# Altium PCB btl.PcbDoc
Units mil, origin at the board's own origin, x right, y up, seen from the top; angles counter-clockwise.
Board outline 2865 x 3710 mil, 2 copper layers (Top Layer, Bottom Layer); 12 components, 18 nets, 88 pads, 0 vias.
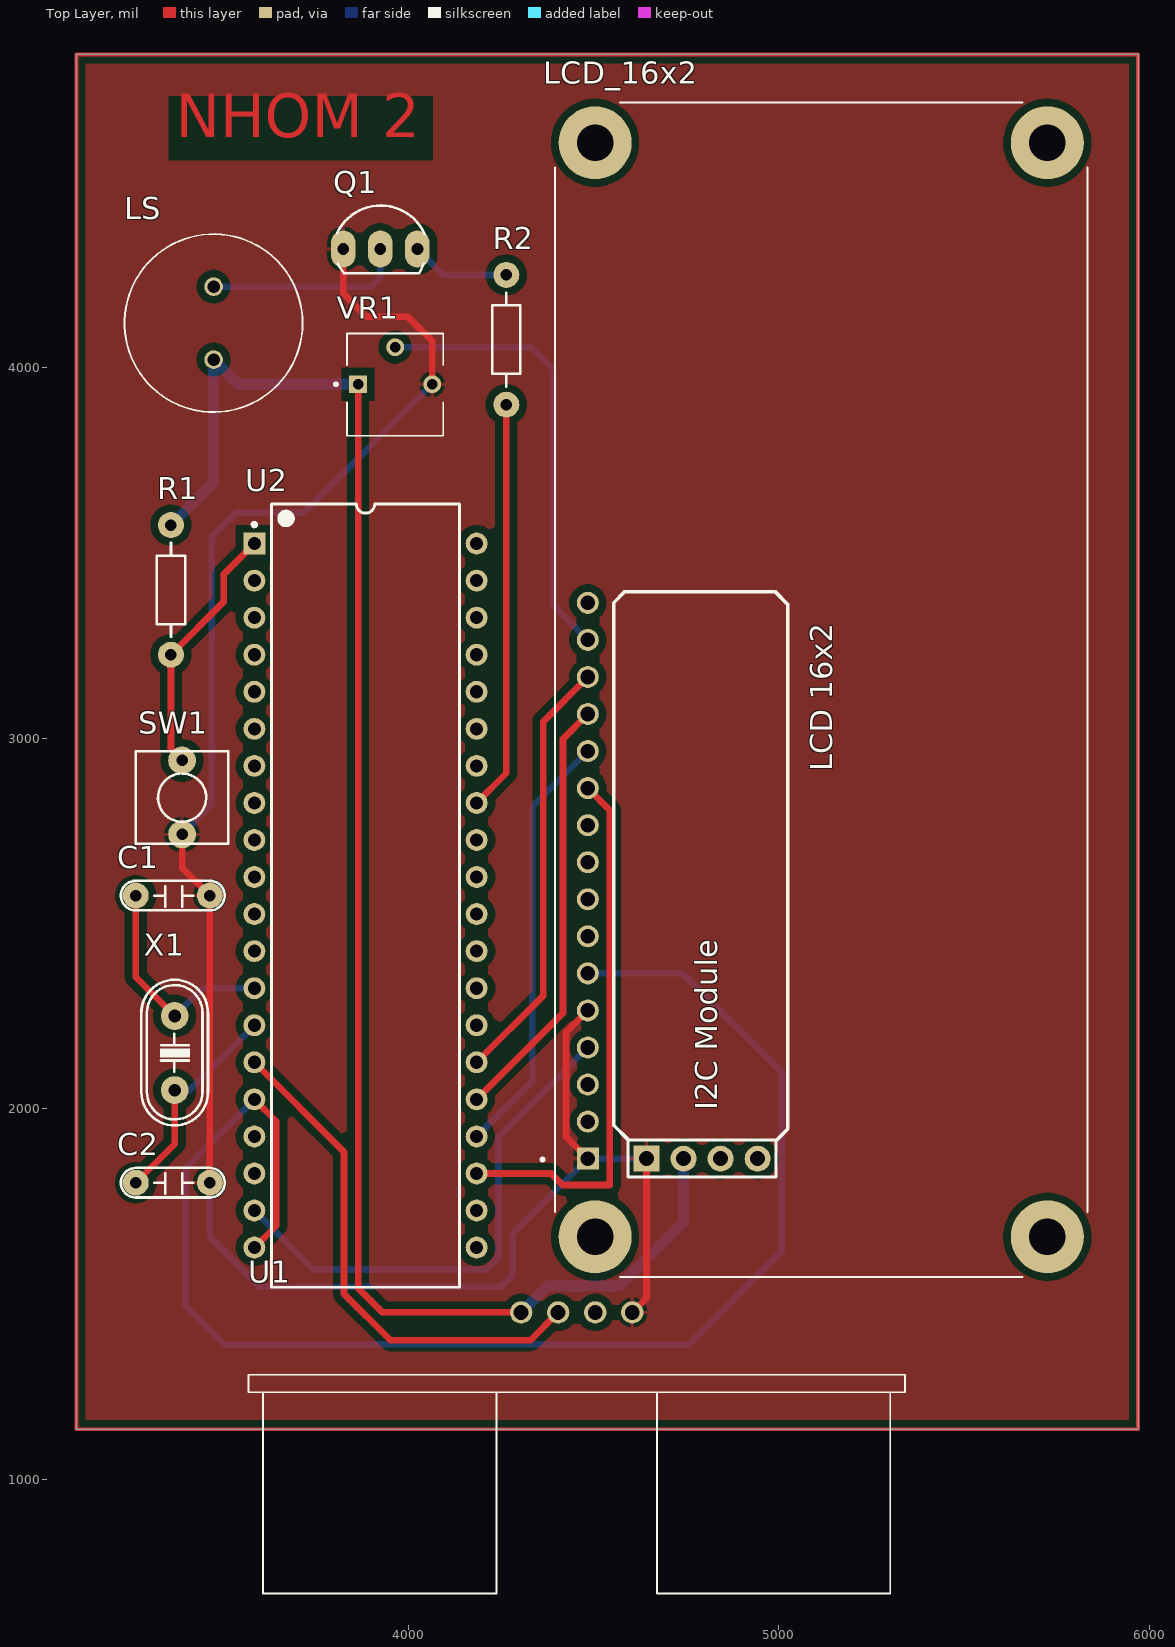
[diagram p0: Top Layer view]
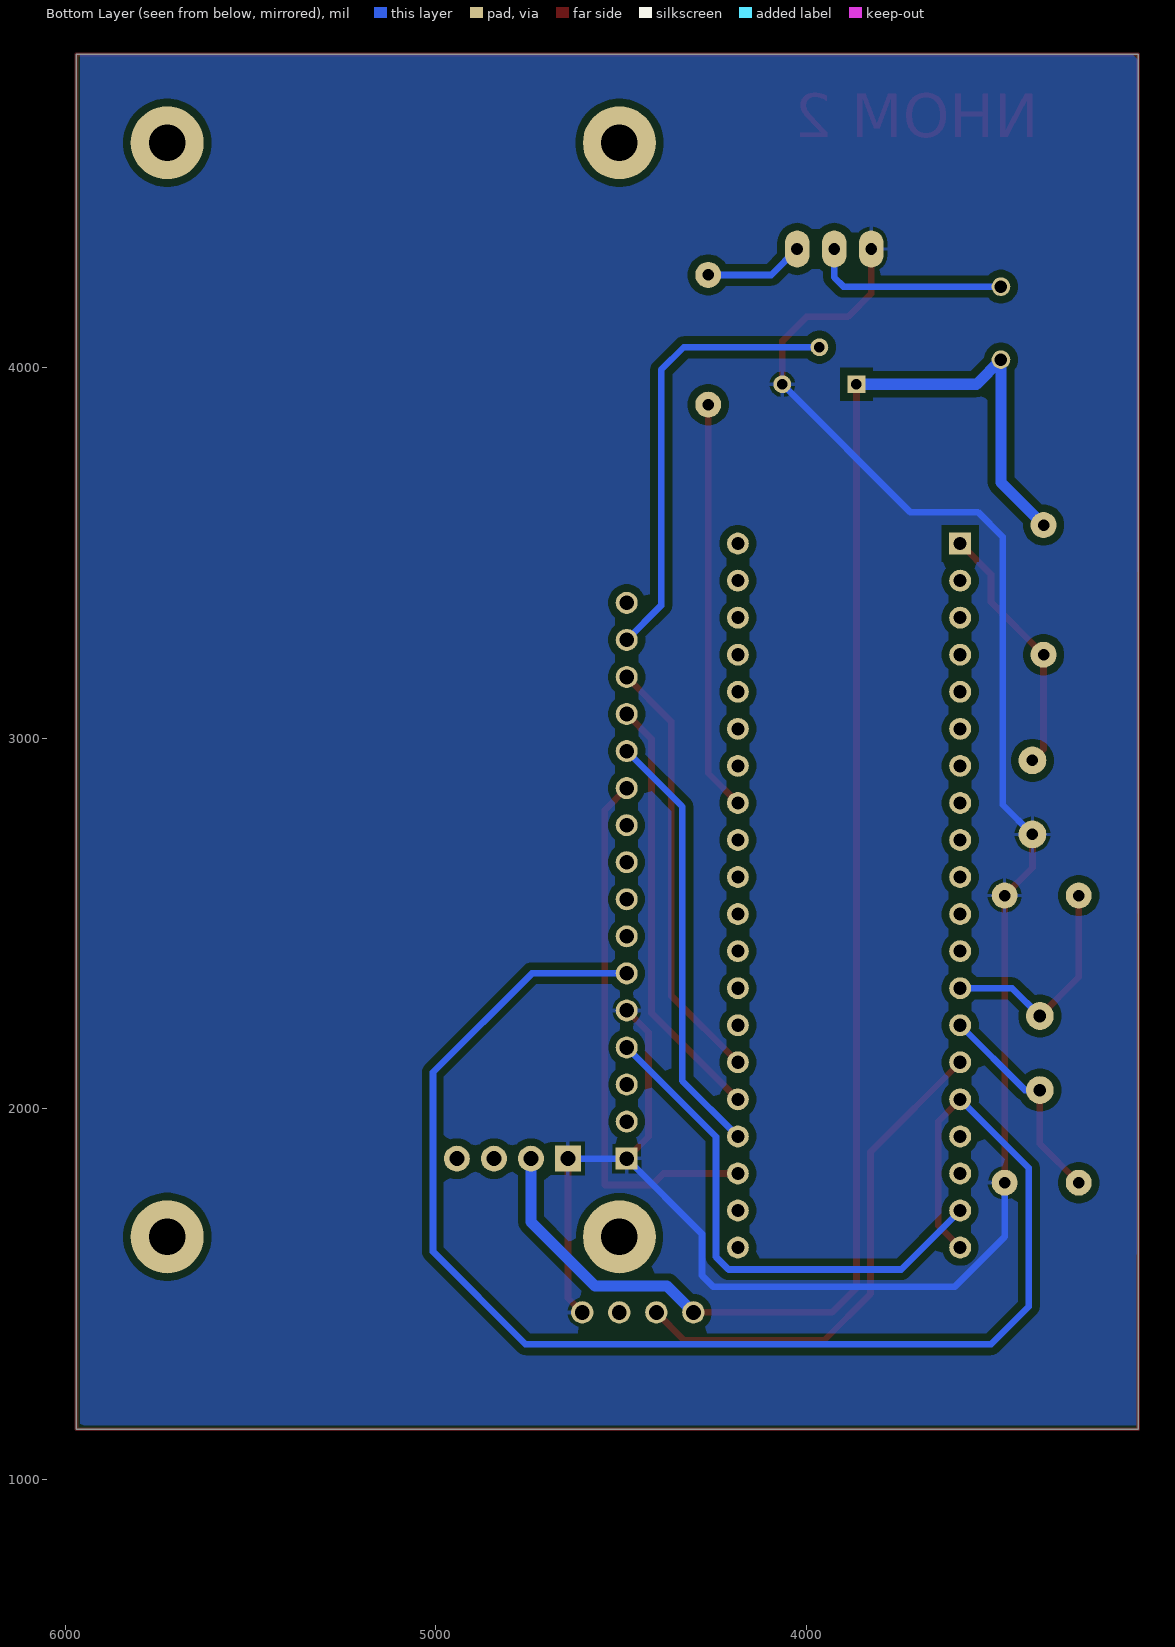
[diagram p1: Bottom Layer view, seen from below]
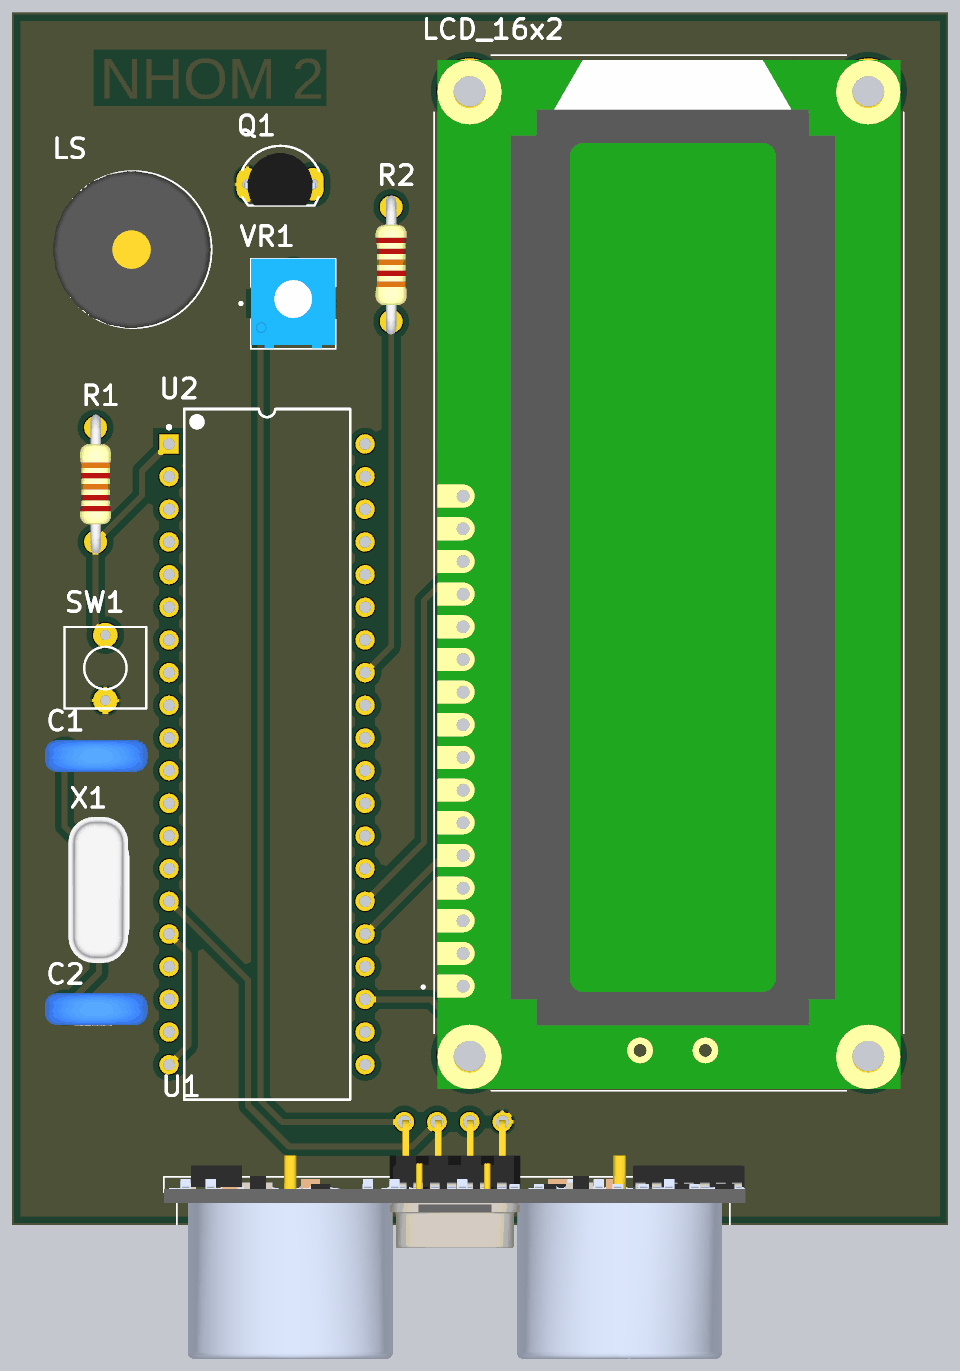
[diagram p2: 3D render of the assembled board from above, using the file's embedded part models]

## Layer stack, top to bottom
Top Solder: solder mask 0.4, Solder Resist, Dk 3.5
Top Layer: signal copper 1.4
Dielectric 1: dielectric 12.6, FR-4, Dk 4.8
Bottom Layer: signal copper 1.4
Bottom Solder: solder mask 0.4, Solder Resist, Dk 3.5

## Board outline
3105,1135 5970,1135 5970,4845 3105,4845

## Design rules (kind name [scope] priority, off if disabled: settings)
Clearance [All] p1: gap=20 ignorepadtopadclearanceinfootprint=FALSE
PolygonConnect [All] p1: connectstyle=Relief reliefconductorwidth=10 reliefentries=4 polygonreliefangle="90 Angle" airgapwidth=10
RoutingVias [All] p1: holewidth=28 width=50 viastyle="Through Hole" minholewidth=28 minwidth=50 maxholewidth=28 maxwidth=50
SolderMaskExpansion [All] p1: expansion=4 istentingtop=FALSE
SupplyNets "Schematic Supply Nets_2" [InNet('GND')] p1: voltage=0.000
SupplyNets "Schematic Supply Nets_1" [InNet('+5V')] p2: voltage=0.000
SupplyNets "Schematic Supply Nets" [InNet('5V')] p3: voltage=0.000
Width D7 [InNet('D7')] p1: maxlimit=18 minlimit=18 preferedwidth=18
Width D6 [All] p2: maxlimit=18 minlimit=18 preferedwidth=18
Width D5 [InNet('D5')] p3: maxlimit=18 minlimit=18 preferedwidth=18
Width D4 [InNet('D4')] p4: maxlimit=18 minlimit=18 preferedwidth=18
Width D1 [InNet('D1')] p5: maxlimit=18 minlimit=18 preferedwidth=18
Width D0 [InNet('D0')] p6: maxlimit=18 minlimit=18 preferedwidth=18
Width C1 [InNet('C1')] p7: maxlimit=18 minlimit=18 preferedwidth=18
Width C0 [InNet('C0')] p8: maxlimit=18 minlimit=18 preferedwidth=18
Width B0 [InNet('B0')] p9: maxlimit=18 minlimit=18 preferedwidth=18
Width GND [InNet('GND')] p10: maxlimit=15 minlimit=15 preferedwidth=15
Width 5V [InNet('+5V')] p11: maxlimit=30 minlimit=30 preferedwidth=30
30 further rules are at their usual default settings.

## Components (designator, comment, footprint, x,y, rotation, side; value= is the part's Value field where it differs from the comment)
C1 "22pF" CN2 3465,2575 r180 top value=0.1uF
C2 "22pF" CN2 3465,1800 r180 top value=0.1uF
LCD_16x2 "LCD_16x2" LCD_16x2 5114.92,3130.35 r90 top
LS "PS1240P02BT" XDCR_PS1240P02BT 3475,4120 r270 top
Q1 "C1815" QTO-92 3925,4320 r0 top
R1 "10k" R1/4W 3360,3575 r270 top value="R1/4W - 1K"
R2 "470" R1/4W 4265,3900 r90 top value="R1/4W - 1K"
SW1 "SW" SW2 3390,2740 r90 top value="SW chip 2 pin"
U1 "HC-SR04" XCVR_HC-SR04 4455,1450 r0 top
U2 "PIC16F877A-I/P" PDIP600-P40 3885,2575 r0 top
VR1 "3362P-1-253LF" TRIM_3362P-1-253LF 3965,3955 r0 top
X1 "20Mhz" XT2 3370,2150 r270 top value=4Mhz

## Footprints (in the part's own frame and the unit in brackets; to place one, negate y for a bottom-side part, rotate by r counter-clockwise, add the part's x,y. Pads: shape width x height; smd on the part's side, far side on the other; paste and mask are expansions set on the pad)
CN2 [mil]
  round 70 hole 31: 1(0,0) 2(200,0)
  silkscreen extent -40,-40 240,40, body extent -54,-44 260,55, height 407
LCD_16x2 [mm]
  rect 1.508x1.508 hole 1: 1(-32.14,16)
  round 1.508 hole 1: 2(-29.6,16) 3(-27.06,16) 4(-24.52,16) 5(-21.98,16) 6(-19.44,16) 7(-16.9,16) 8(-14.36,16) 9(-11.82,16) 10(-9.28,16) 11(-6.74,16) 12(-4.2,16) 13(-1.66,16) 14(0.88,16) 15(3.42,16) 16(5.96,16)
  rect 1.778x1.778 hole 1.016: GND(-32.14,11.977)
  round 5 hole 2.5: S1(-37.5,15.5) S2(37.5,15.5) S3(37.5,-15.5) S4(-37.5,-15.5)
  round 1.778 hole 1.016: SCL(-32.14,4.357) SDA(-32.14,6.897) VCC(-32.14,9.437)
  silkscreen extent -40.25,-18.25 40.25,19.2, body extent -40.13,-18 39.87,18, height 10.68
PDIP600-P40 [mm] "DIP, 40-Leads, Row Spacing 15.24mm, Pitch 2.54mm, Body 51.8x13.5mm"
  rect 1.5x1.5 hole 0.9: 1(-7.62,24.13)
  round 1.5 hole 0.9: 2(-7.62,21.59) 3(-7.62,19.05) 4(-7.62,16.51) 5(-7.62,13.97) 6(-7.62,11.43) 7(-7.62,8.89) 8(-7.62,6.35) 9(-7.62,3.81) 10(-7.62,1.27) 11(-7.62,-1.27) 12(-7.62,-3.81) 13(-7.62,-6.35) 14(-7.62,-8.89) 15(-7.62,-11.43) 16(-7.62,-13.97) 17(-7.62,-16.51) 18(-7.62,-19.05) 19(-7.62,-21.59) 20(-7.62,-24.13) 21(7.62,-24.13) 22(7.62,-21.59) 23(7.62,-19.05) 24(7.62,-16.51) 25(7.62,-13.97) 26(7.62,-11.43) 27(7.62,-8.89) 28(7.62,-6.35) 29(7.62,-3.81) 30(7.62,-1.27) 31(7.62,1.27) 32(7.62,3.81) 33(7.62,6.35) 34(7.62,8.89) 35(7.62,11.43) 36(7.62,13.97) 37(7.62,16.51) 38(7.62,19.05) 39(7.62,21.59) 40(7.62,24.13)
  silkscreen extent -7.74,-26.85 6.45,26.85, body extent -7.3,-26.85 7.3,26.85, height 6.35
QTO-92 [mil] "TO-92"
  oval 66x100 hole 32: 1(-100,0) 2(0,0) 3(100,0)
  silkscreen extent -117,-65 120,118, body extent -109,-66 109,95, height 245
R1/4W [mil] "R 1/4W, 2 Pin, 350mil"
  round 70 hole 31: 1(0,0) 2(350,0)
  silkscreen extent 48,-38 302,38, body extent -40,-47 386,47, height 111
SW2 [mil] "SW button 2pin, 250x 250 mil"
  round 75 hole 31: 1(0,0) 2(200,0)
  silkscreen extent -25,-125 225,125
TRIM_3362P-1-253LF [mil]
  rect 48.11x48.11 / inner round 48.11 / far side rect 48.11x48.11 hole 28.11: 1(-100,0)
  round 48.11 hole 28.11: 2(0,100) 3(100,0)
  silkscreen extent -164,-139 130,137, body extent -130,-138 130,138, height 192
XCVR_HC-SR04 [mm]
  round 1.53 hole 1.02: 1(-3.81,0) 2(-1.27,0) 3(1.27,0) 4(3.81,0)
  silkscreen extent -22.5,-19.27 22.5,-4.27, body extent -22.47,-18.42 22.73,0.13, height 20.46
XDCR_PS1240P02BT [mm]
  round 1.28 hole 0.85: 1(-2.5,0) 2(2.5,0)
  silkscreen extent -6.1,-6.1 6.1,6.1, body extent -6.1,-6.22 6.1,5.98, height 6.68
XT2 [mil] "Footpin for Crystal 2 pin"
  round 75 hole 34: 1(-100,0) 2(100,0)
  silkscreen extent -198,-90 195,90, body extent -233,-93 213,90, height 138

## Part data
C1 C2: library part CN2, "Cap np 104 => 105pF"
LCD_16x2: "Display: LCD; alphanumeric; STN Negative; 16x2; blue; LED; PIN: 16", Package=None, Availability=Unavailable, MP=RC1602B-BIW-CSV, Price=None
LS: "Buzzers Transducer, Externally Driven Piezo 3V 4kHz 60dB @ 3V, 10cm Through Hole PC Pins", Package="2020 TDK", Availability=Unavailable, MF=TDK, MP=PS1240P02BT, Price=None, SnapEDA_Link=https://www.snapeda.com/parts/PS1240P02BT/TDK/view-part/53420/?ref=snap
Q1: "NPN 600mW, ECB"
R1 R2: library part R1/4W, "Resistor 1/4W"
SW1: library part SW2, "Switch button 2 pin"
U1: "Ultrasonic Sensor Module", Package=None, Availability=Unavailable, MP=HC-SR04, Price=None
U2: "Enhanced FLASH Microcontroller, 8K (x14-Bit words) FLASH, 368 Bytes RAM, 40-Pin PDIP, Standard VDD Range, Industrial Temperature", Supplier Part Number 1=PIC16F877A-I/P-ND, ComponentAvailability="Unknown. Contact manufacturer to determine status.", ComponentLink1Description=Datasheet, ComponentLink1URL=http://ww1.microchip.com/downloads/en/DeviceDoc/39582b.pdf, ComponentLink2Description="Packaging Specification", ComponentLink2URL=http://www.microchip.com/stellent/groups/techpub_sg/documents/packagingspec/en012702.pdf, ComponentLink3Description="Microchip.com Home", ComponentLink3URL=http://www.microchip.com/, DatasheetVersion="revB, Oct-2003", LatestRevisionDate=29-Jan-2009, LatestRevisionNote="Sch. layout revised. 3D Model Removed.", PackageDescription="40-Lead Plastic Dual In-Line (P) - 600 mil Body [PDIP]", PackageReference=PDIP600-P40, PackageVersion="revBB, Aug-2009", Published=11-Oct-2004, Publisher="Altium Limited", Supplier 1=Digi-Key, Supplier 2=Farnell, Supplier 3=Farnell, Supplier Part Number 2=1523966, Supplier Part Number 3=9761446
VR1: "25 kOhms 0.5W, 1/2W PC Pins Through Hole Trimmer Potentiometer Cermet 1.0 Turn Top Adjustment", Package="3362P-1 Bourns Inc.", Availability="In Stock", Check_prices=https://www.snapeda.com/parts/3362P-1-253LF/Bourns/view-part/?ref=eda, MF=Bourns, MP=3362P-1-253LF, Price=None, Purchase-URL=https://pricing.snapeda.com/search/part/3362P-1-253LF/?ref=eda, SnapEDA_Link=https://www.snapeda.com/parts/3362P-1-253LF/Bourns/view-part/?ref=snap
X1: library part XT2, "Crystal For all Crystal 2pin."

## Nets (pads, with @x,y where several pads share a name; then routed paths per layer and width w, separated by ;. In a path a pad name is that pad's centre, name@x,y a point inside that pad or via, vN(x,y) a via of type N, cw(c..) or ccw(c..) an arc to the next point about the centre after c; other vN are vias at no path point)
5V: LCD_16x2.2
+5V: LCD_16x2.VCC LS.2 R1.1 U1.1 VR1.1 | length 4528.3
  Top Layer w18: VR1.1 3865,1516 3931,1450 U1.1
  Bottom Layer w30: R1.1 3475,3690 LS.2 3541.57,3955 VR1.1 ; U1.1 4376,1521 4570,1521 4743.38,1694.38 LCD_16x2.VCC
B0: R2.1 U2.33 | length 1108.1
  Top Layer w18: U2.33 4265,2905 R2.1
C0: U1.2 U2.15 | length 1386.1
  Top Layer w18: U2.15 3827,1883 3827,1500 3952,1375 4330,1375 U1.2
C1: U1.3
D0: LCD_16x2.4 U2.19 | length 1403.8
  Bottom Layer w18: U2.19 3744,1566 4210,1566 4244,1600 4244,1924 LCD_16x2.4
D1: LCD_16x2.6 U2.16 U2.20 | length 3955.9
  Top Layer w18: U2.20 3644,1684 3644,1966 U2.16
  Bottom Layer w18: U2.16 3400,1840 3400,1466 3502,1364 4758,1364 5008,1614 5008,2098 4741,2365 LCD_16x2.6
D4: LCD_16x2.11 U2.23 | length 1467.3
  Top Layer w18: U2.23 4386,1825 4417,1794 4544,1794 4544,2806 LCD_16x2.11
D5: LCD_16x2.12 U2.24 | length 1164.3
  Bottom Layer w18: U2.24 4335,2075 4335,2815 LCD_16x2.12
D6: LCD_16x2.13 U2.25 | length 1164.3
  Top Layer w18: U2.25 4418,2258 4418,2998 LCD_16x2.13
D7: LCD_16x2.14 U2.26 | length 1164.3
  Top Layer w18: U2.26 4365,2305 4365,3045 LCD_16x2.14
GND: C1.1 C2.1 LCD_16x2.1 LCD_16x2.5 LCD_16x2.GND Q1.1 SW1.1 U1.4 VR1.3 | length 5571.7
  Top Layer w18: SW1.1 3390,2650 C1.1 C2.1 ; Q1.1 3825,4200 3888,4137 4000,4137 4065,4072 VR1.3 ; LCD_16x2.1 4426,1924 4426,2206 LCD_16x2.5 ; U1.4 4643.38,1488.38 LCD_16x2.GND
  Bottom Layer w18: SW1.1 3470,2820 3470,3542.77 3537.23,3610 3720,3610 VR1.3 ; C2.1 3465,1654 3600,1519 4251,1519 4282,1550 4282,1662 LCD_16x2.1 4564.01,1864.99 LCD_16x2.GND
NetC1_2: C1.2 U2.13 X1.1 | length 614.6
  Top Layer w18: C1.2 3265,2355 X1.1
  Bottom Layer w18: X1.1 3445,2325 U2.13
NetC2_2: C2.2 U2.14 X1.2 | length 581
  Top Layer w18: C2.2 3370,1905 X1.2
  Bottom Layer w18: X1.2 3410,2050 U2.14
NetLCD_16x2_15: LCD_16x2.15 VR1.2 | length 1219.8
  Bottom Layer w18: VR1.2 4331,4055 4392,3994 4392,3358 LCD_16x2.15
NetLS_1: LS.1 Q1.2 | length 536.9
  Bottom Layer w18: LS.1 3900,4218.43 3925,4243.43 Q1.2
NetQ1_3: Q1.3 R2.2 | length 269
  Bottom Layer w18: Q1.3 4095,4250 R2.2
NetR1_2: R1.2 SW1.2 U2.1 | length 690.6
  Top Layer w18: SW1.2 3360,2970 R1.2 3502,3367 3502,3442 U2.1
pads on no net: LCD_16x2.3 LCD_16x2.7 LCD_16x2.8 LCD_16x2.9 LCD_16x2.10 LCD_16x2.16 LCD_16x2.S1 LCD_16x2.S2 LCD_16x2.S3 LCD_16x2.S4 LCD_16x2.SCL LCD_16x2.SDA U2.2 U2.3 U2.4 U2.5 U2.6 U2.7 U2.8 U2.9 U2.10 U2.11 U2.12 U2.17 U2.18 U2.21 U2.22 U2.27 U2.28 U2.29 U2.30 U2.31 U2.32 U2.34 U2.35 U2.36 U2.37 U2.38 U2.39 U2.40
copper on no net: | length 13150
  Top Layer w10: 3105,1135 3105,4845 5970,4845 5970,1135 3105,1135

## Polygon pours and split planes (outlines as drawn)
GND on Top Layer "GND_L01_P000" (solid, pour order 0): 3105,4845 5970,4845 5965,4840 5965,1145 3125,1145 3110,1130
GND on Bottom Layer "GND_L02_P001" (solid, pour order 1): 3105,4830 3120,4845 5960,4845 5960,1135 5950,1145 3110,1145

## Other copper
Top Layer:
  text "NHOM 2" at 3373.49,4582.22 h200

## Text inside footprints (layer, text, board x,y; h text height)
LCD_16x2: Top Overlay "I2C Module" at 4834.92,1995.35 h60 r90; Top Overlay "LCD 16x2" at 5144.92,2910.36 h60 r90